# Allegro board LNA.brd
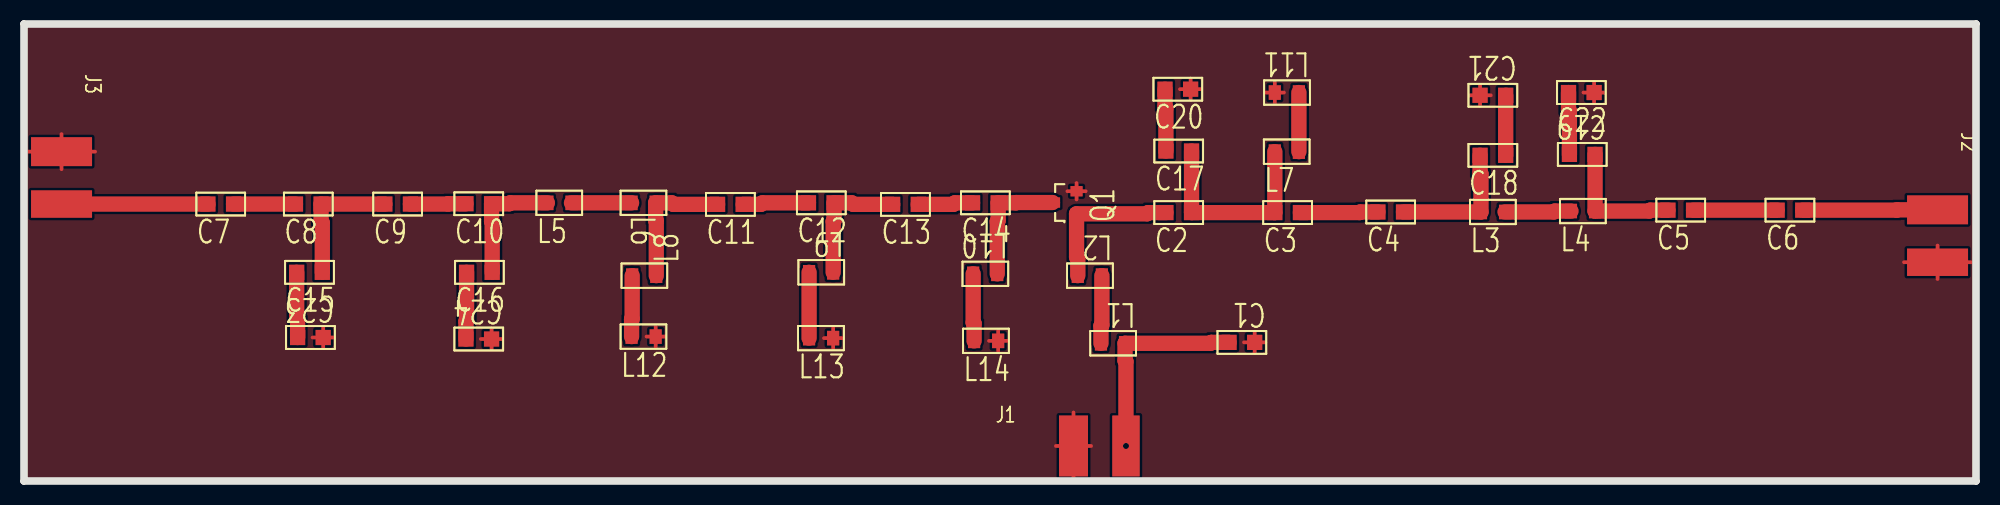
[diagram p0: board, top side]
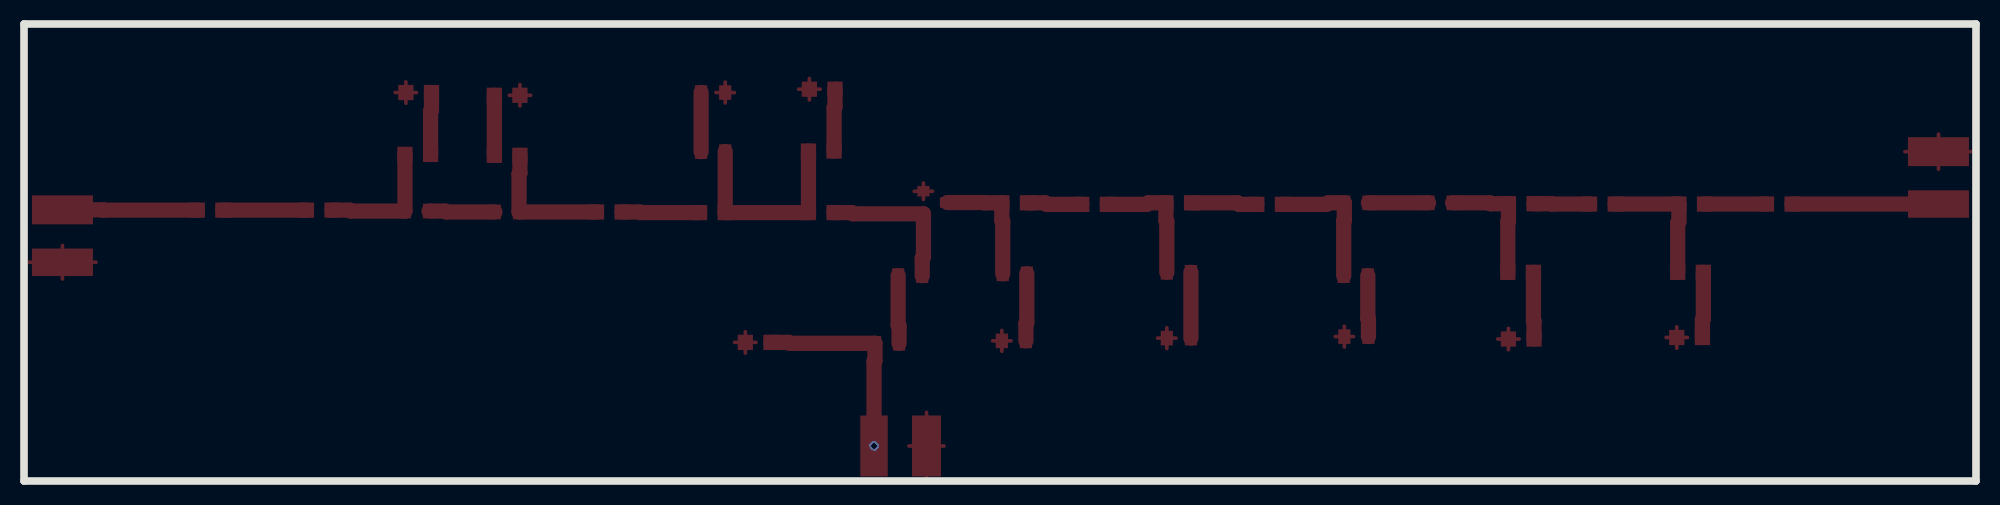
[diagram p1: board, bottom side, seen from below]

Outline 162.56 x 38.1 mm; copper layers: TOP, BOTTOM. Coordinates in mm from the lower left corner of the outline.
Outline path: 0,38.1 162.56,38.1 162.56,0 0,0 0,38.1

## Design rules (mm)
constraint set DEFAULT: min track width 0.305

## Placement (name value [footprint] x y rotation side)
C1  C NP  [SMC0805]  102.49 11.56 180 top
C2  C NP  [SMC0805]  95.1 22.38 0 top
C3  C NP  [SMC0805]  104.17 22.38 0 top
C4  C NP  [SMC0805]  112.75 22.43 0 top
C5  C NP  [SMC0805]  136.91 22.58 0 top
C6  C NP  [SMC0805]  146 22.58 0 top
C7  C NP  [SMC0805]  15.32 23.09 0 top
C8  C NP  [SMC0805]  22.61 23.09 0 top
C9  C NP  [SMC0805]  30.05 23.09 0 top
C10  C NP  [SMC0805]  36.8 23.11 0 top
C11  C NP  [SMC0805]  57.76 23.06 0 top
C12  C NP  [SMC0805]  65.33 23.19 0 top
C13  C NP  [SMC0805]  72.34 23.06 0 top
C14  C NP  [SMC0805]  78.99 23.19 0 top
C15  C NP  [SMC0805]  22.71 17.4 0 top
C16  C NP  [SMC0805]  36.86 17.4 0 top
C17  C NP  [SMC0805]  95.1 27.51 0 top
C18  C NP  [SMC0805]  121.26 27.15 0 top
C19  C NP  [SMC0805]  130.84 27.23 180 top
C20  C NP  [SMC0805]  95.02 32.66 0 top
C21  C NP  [SMC0805]  123.39 32.16 180 top
C22  C NP  [SMC0805]  128.63 32.38 0 top
C23  C NP  [SMC0805]  24.92 11.96 180 top
C24  C NP  [SMC0805]  38.94 11.84 180 top
J1  2Pin Header  [SMA_440W_200L]  86.18 5.46 0 top
J2  2Pin Header  [SMA_440W_200L]  161.9 23.83 270 top
J3  2Pin Header  [SMA_440W_200L]  5.66 28.68 270 top
L1  INDUCTOR  [SML0805]  91.69 11.48 180 top
L2  INDUCTOR  [SML0805]  89.76 17.12 180 top
L3  INDUCTOR  [SML0805]  121.34 22.43 0 top
L4  INDUCTOR  [SML0805]  128.83 22.5 0 top
L5  INDUCTOR  [SML0805]  43.59 23.19 0 top
L6  INDUCTOR  [SML0805]  50.6 23.19 0 top
L7  INDUCTOR  [SML0805]  104.17 27.46 0 top
L8  INDUCTOR  [SML0805]  52.65 17.12 180 top
L9  INDUCTOR  [SML0805]  67.39 17.4 180 top
L10  INDUCTOR  [SML0805]  81.05 17.27 180 top
L11  INDUCTOR  [SML0805]  106.17 32.38 180 top
L12  INDUCTOR  [SML0805]  50.6 12.04 0 top
L13  INDUCTOR  [SML0805]  65.38 11.91 0 top
L14  INDUCTOR  [SML0805]  79.12 11.68 0 top
Q1  MMFB5486  [SMSOT23DSG]  87.66 24.16 90 top

## Library data of the parts
C1-C24 = C NP
J1-J3 = 2Pin Header
L1-L14 = INDUCTOR
Q1 = J2N5486_1

## Footprints (pads in the part's own frame, mm; a bottom-side part is the same pattern mirrored in y, then rotated)
SMA_440W_200L
  rect 2.286x5.08 smd: 1(5.588,-2.54)
  rect 2.413x5.08 smd: 2(1.219,-2.54)
SMC0805
  rect 1.27x1.27 smd: 1(0,0) 2(2.134,0)
SML0805
  rect 1.016x1.219 smd: 1(0,0) 2(2.007,0)
SMSOT23DSG
  rect 0.864x1.016 smd: D(-1.88,0) S(0,0)
  rect 0.864x1.27 smd: G(-0.94,2.007)

## Nets
GND: C1.1 C20.2(B) C21.2(B) C22.2(B) C23.1 C24.1 J1.2 J2.1 J3.2 L11.2 L12.2 L13.2 L14.2 Q1.S
N00666: L1.2 L2.1
N00942: C2.1 L2.2 Q1.D
N00967: C2.2(B) C3.1 C17.2(B) L7.1
N00979: C3.2(B) C4.1
N00983: C4.2(B) C18.1 L3.1
N01017: C18.2(B) C21.1
N01021: C17.1 C20.1
N01025: C14.2(B) L10.1 Q1.G
N01058: C13.2(B) C14.1
N01062: C12.2(B) C13.1 L9.1
N01066: C11.2(B) C12.1
N01098: C11.1 L6.2 L8.1
N01122: C10.2(B) C16.2(B) L5.1
N01129: C16.1 C24.2(B)
N01314: L8.2 L12.1
N01318: L9.2 L13.1
N01322: L10.2 L14.1
N01336: L7.2 L11.1
N01366: L3.2 L4.1
N01743: C1.2(B) J1.1 L1.1
N02297: C9.2(B) C10.1
N02301: C8.2(B) C9.1 C15.2(B)
N02350: C15.1 C23.2(B)
N02696: L5.2 L6.1
N02958: C7.2(B) C8.1
N02962: C7.1 J3.1
N03083: C5.1 C19.1 L4.2
N03087: C5.2(B) C6.1
N03091: C6.2(B) J2.2
N03108: C19.2(B) C22.1

## Via types
v1: diameter 0.762, hole 0.508, TOP to BOTTOM, 1 via

## Routing (per net, layer and track width the routed paths; a pad name or vN(x,y) marks a point on that pad's centre or on a via; arc(x,y) is an arc through that point)
GND: length 62.8
  TOP w0.305: 121.26,31.26 C21.2 ; C21.2 120.37,32.16 ; C21.2 122.15,32.16 ; C21.2 121.26,33.05 ; C22.2 130.76,33.28 ; C22.2 130.76,31.49 ; C22.2 129.87,32.38 ; C22.2 131.65,32.38 ; C24.1 39.83,11.84 ; C24.1 38.05,11.84 ; C24.1 38.94,10.94 ; C24.1 38.94,12.73 ; 96.26,32.66 C20.2 ; C20.2 97.15,31.77 ; C20.2 97.15,33.56 ; C20.2 98.05,32.66 ; 66.62,11.91 L13.2 ; L13.2 67.39,12.78 ; L13.2 67.39,11.05 ; L13.2 68.15,11.91 ; 87.4,0.12 87.4,2.92 ; 87.4,2.92 87.4,5.72 ; 87.4,2.92 85.94,2.92 ; 87.4,2.92 88.86,2.92 ; J2.1 159.36,19.64 ; J2.1 159.36,16.84 ; J2.1 162.16,18.24 ; J2.1 156.56,18.24 ; 101.6,11.56 C1.1 ; C1.1 103.38,11.56 ; C1.1 102.49,12.45 ; C1.1 102.49,10.67 ; Q1.S 87.66,24.84 ; Q1.S 86.89,24.16 ; Q1.S 87.66,23.47 ; Q1.S 88.42,24.16 ; L11.2 104.17,33.25 ; L11.2 103.4,32.38 ; L11.2 104.17,31.52 ; L11.2 104.93,32.38 ; 24.03,11.96 C23.1 ; C23.1 24.92,11.07 ; C23.1 24.92,12.85 ; C23.1 25.81,11.96 ; 0.33,27.46 J3.2 ; J3.2 3.12,28.92 ; J3.2 5.92,27.46 ; J3.2 3.12,25.99 ; L12.2 53.37,12.04 ; L12.2 52.6,12.91 ; L12.2 52.6,11.17 ; L12.2 51.84,12.04 ; 80.36,11.68 L14.2 ; L14.2 81.13,12.55 ; L14.2 81.13,10.82 ; L14.2 81.89,11.68
N00666: length 5.7
  TOP w1.27: L1.2 89.69,12.93 89.76,13 L2.1
N00942: length 12.7
  TOP w1.27: L2.2 87.76,18.57 87.66,18.67 Q1.D 93.52,22.28 93.62,22.38 C2.1
N00967: length 17.1
  TOP w1.27: L7.1 C3.1 C2.2 C17.2
N00979: length 6.5
  TOP w1.27: C4.1 111.28,22.43 111.23,22.38 C3.2
N00983: length 11.2
  TOP w1.27: C4.2 L3.1 121.34,25.6 121.26,25.68 C18.1
N01017: length 5
  TOP w1.27: C18.2 C21.1
N01021: length 5.2
  TOP w1.27: C17.1 95.1,31.12 95.02,31.19 C20.1
N01025: length 10.5
  TOP w1.27: L10.1 81.05,21.64 81.13,21.72 C14.2 82.6,23.19 82.63,23.22 Q1.G
N01058: length 4.6
  TOP w1.27: C14.1 77.52,23.19 77.39,23.06 C13.2
N01062: length 10.8
  TOP w1.27: L9.1 67.39,21.64 67.46,21.72 C12.2 68.94,23.19 69.06,23.06 C13.1
N01066: length 5.5
  TOP w1.27: C11.2 61.37,23.06 61.49,23.19 C12.1
N01098: length 11.3
  TOP w1.27: C11.1 54.08,23.06 53.95,23.19 L6.2 52.6,21.74 52.65,21.69 L8.1
N01122: length 10.4
  TOP w1.27: L5.1 40.49,23.19 40.41,23.11 C10.2 38.94,21.64 38.99,21.59 C16.2
N01129: length 5.6
  TOP w1.27: C24.2 36.8,13.31 36.86,13.36 C16.1
N01314: length 5.1
  TOP w1.27: L12.1 50.6,13.49 50.65,13.54 L8.2
N01318: length 5.5
  TOP w1.27: L9.2 L13.1
N01322: length 5.6
  TOP w1.27: L10.2 79.04,13.21 79.12,13.13 L14.1
N01336: length 4.9
  TOP w1.27: L7.2 L11.1
N01366: length 5.5
  TOP w1.27: L3.2 127.41,22.43 127.48,22.5 L4.1
N01743: length 17.3
  TOP w1.27: C1.2 98.88,11.56 98.81,11.48 L1.1 91.69,10.03 91.77,9.96 v1(91.77,2.92)
N02297: length 4.6
  TOP w1.27: C9.2 35.31,23.09 35.33,23.11 C10.1
N02301: length 11
  TOP w1.27: C9.1 C8.2 24.74,21.62 24.84,21.51 C15.2
N02350: length 5.5
  TOP w1.27: C23.2 22.78,13.44 22.71,13.51 C15.1
N02696: length 5
  TOP w1.27: L6.1 L5.2
N02958: length 5.2
  TOP w1.27: C8.1 C7.2
N02962: length 12.2
  TOP w1.27: C7.1 J3.1
N03083: length 10.8
  TOP w1.27: C5.1 135.43,22.58 135.36,22.5 L4.2 C19.1
N03087: length 7
  TOP w1.27: C5.2 C6.1
N03091: length 11.2
  TOP w1.27: C6.2 155.96,22.58 155.98,22.61 J2.2
N03108: length 5.2
  TOP w1.27: C19.2 128.7,30.84 128.63,30.91 C22.1

## Copper pours and planes (outline as drawn; the poured copper is in the pictures)
GND on TOP: 0,38.1 0,0 162.56,0 162.56,38.1
